# Altium PCB BSPD.PcbDoc
Units mm, origin at the board's own origin, x right, y up, seen from the top; angles counter-clockwise.
Board outline 49.96 x 69.09 mm, 2 copper layers (Top Layer, Bottom Layer), stack 1.671 mm thick; 35 components, 25 nets, 127 pads, 37 vias.
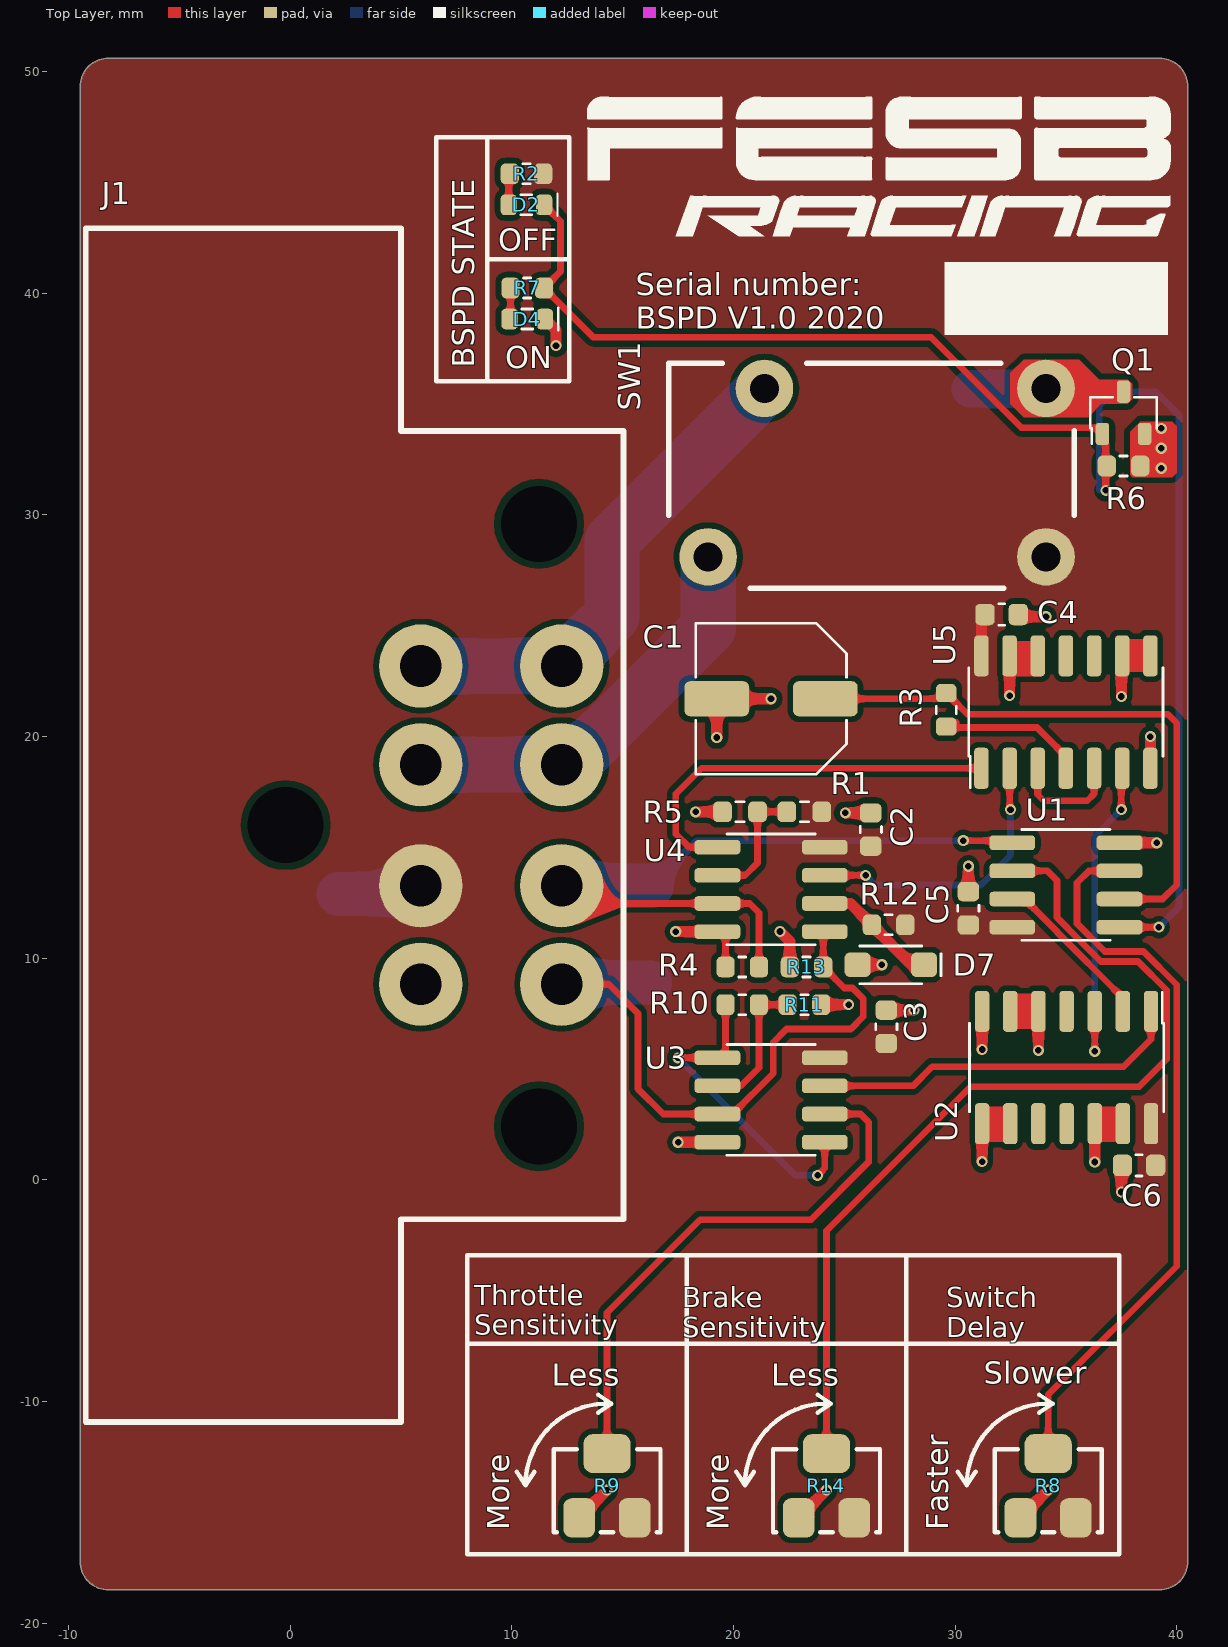
[diagram p0: Top Layer view]
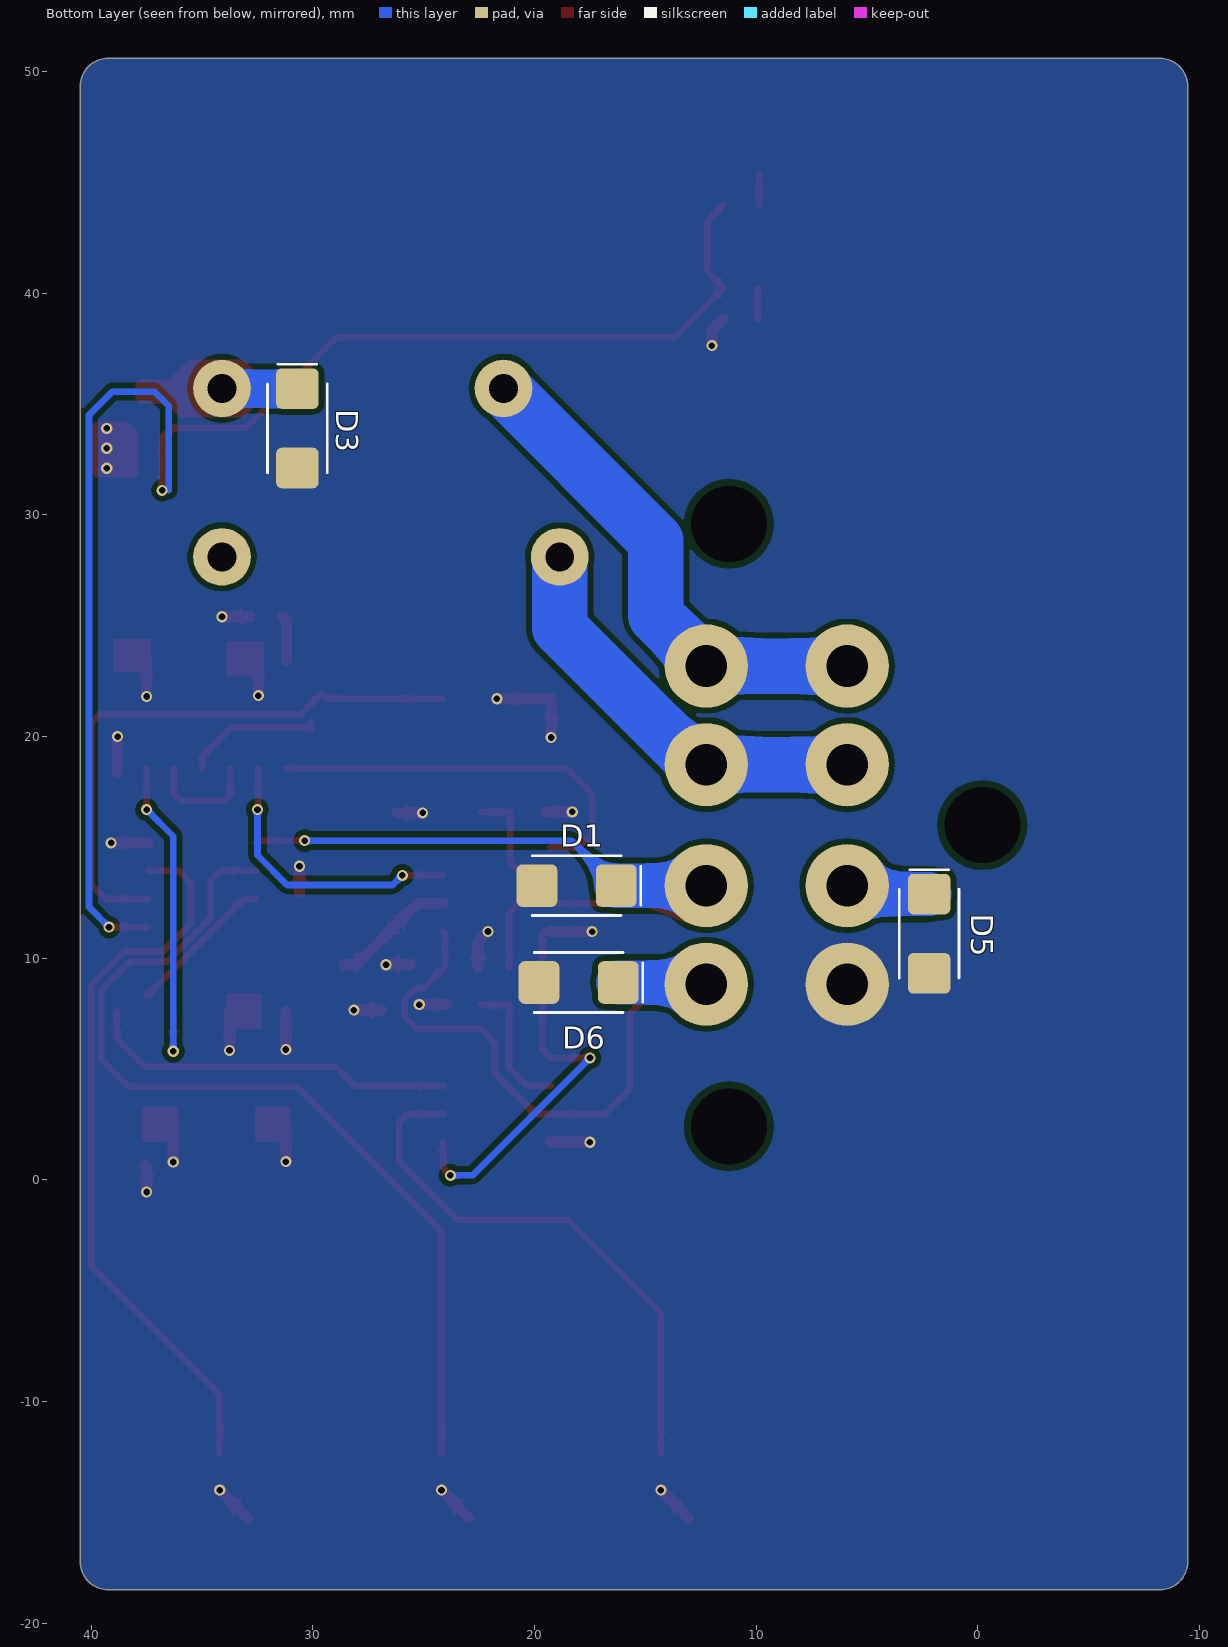
[diagram p1: Bottom Layer view, seen from below]
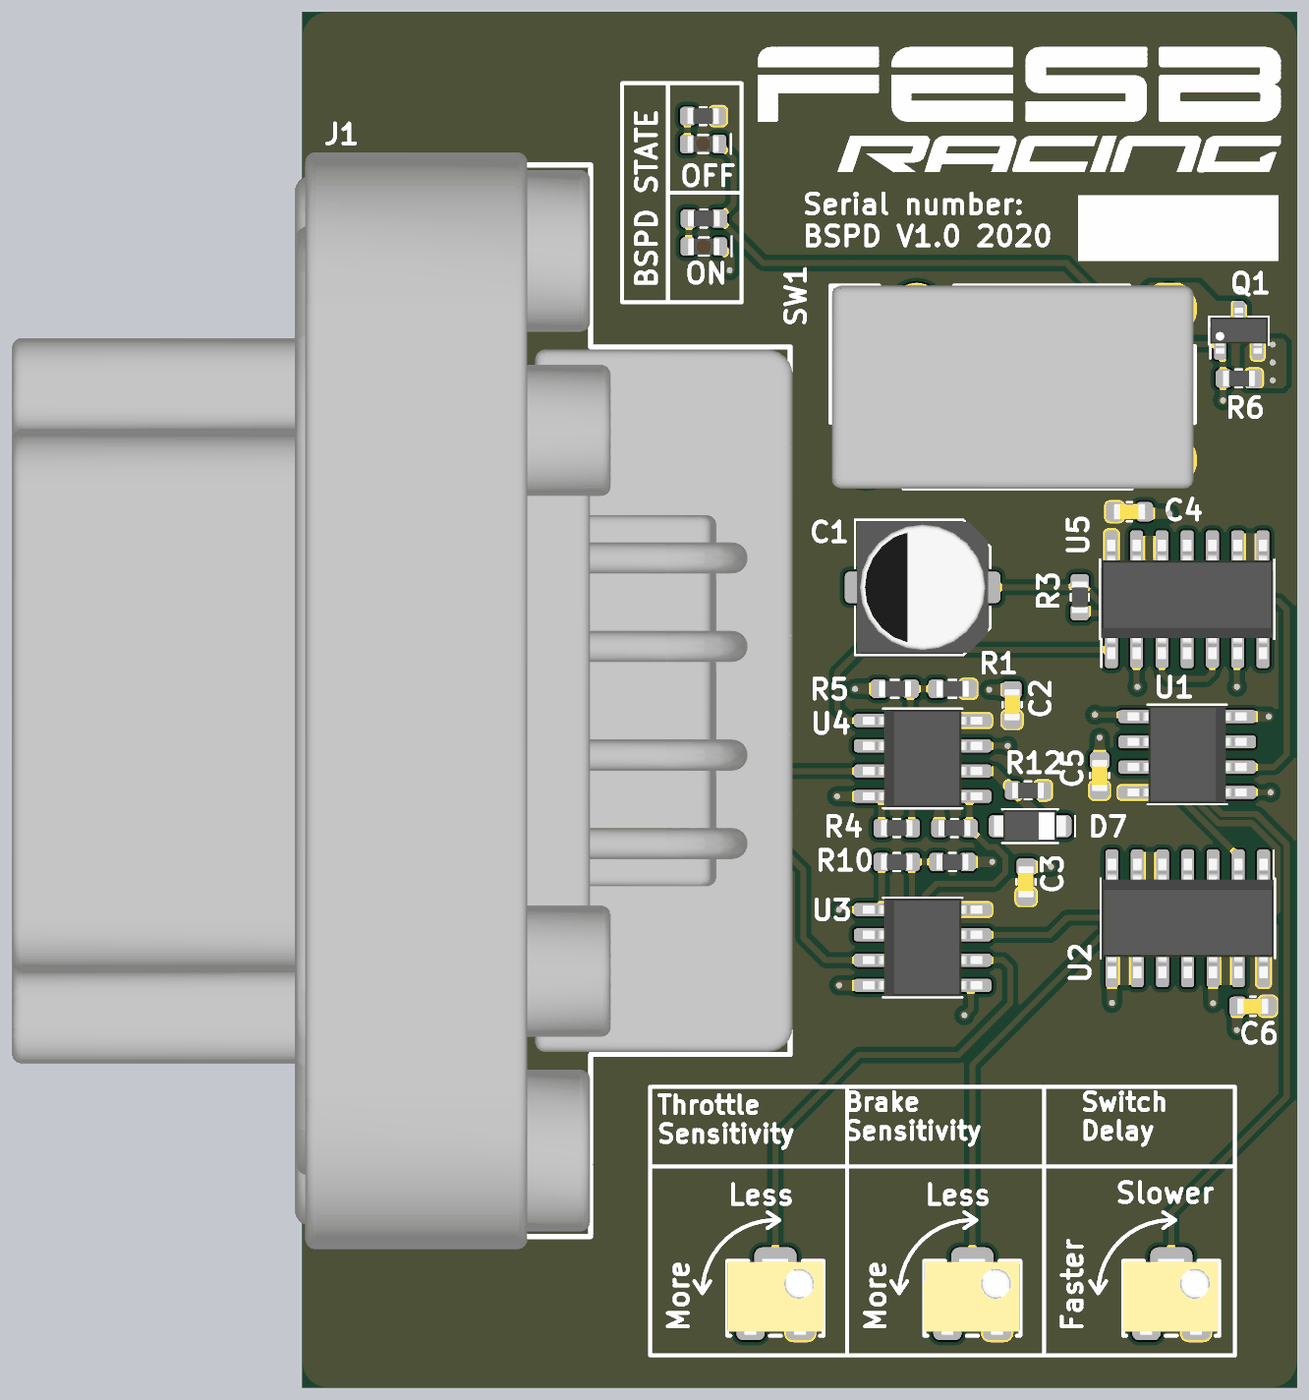
[diagram p2: 3D render of the assembled board from above, using the file's embedded part models]
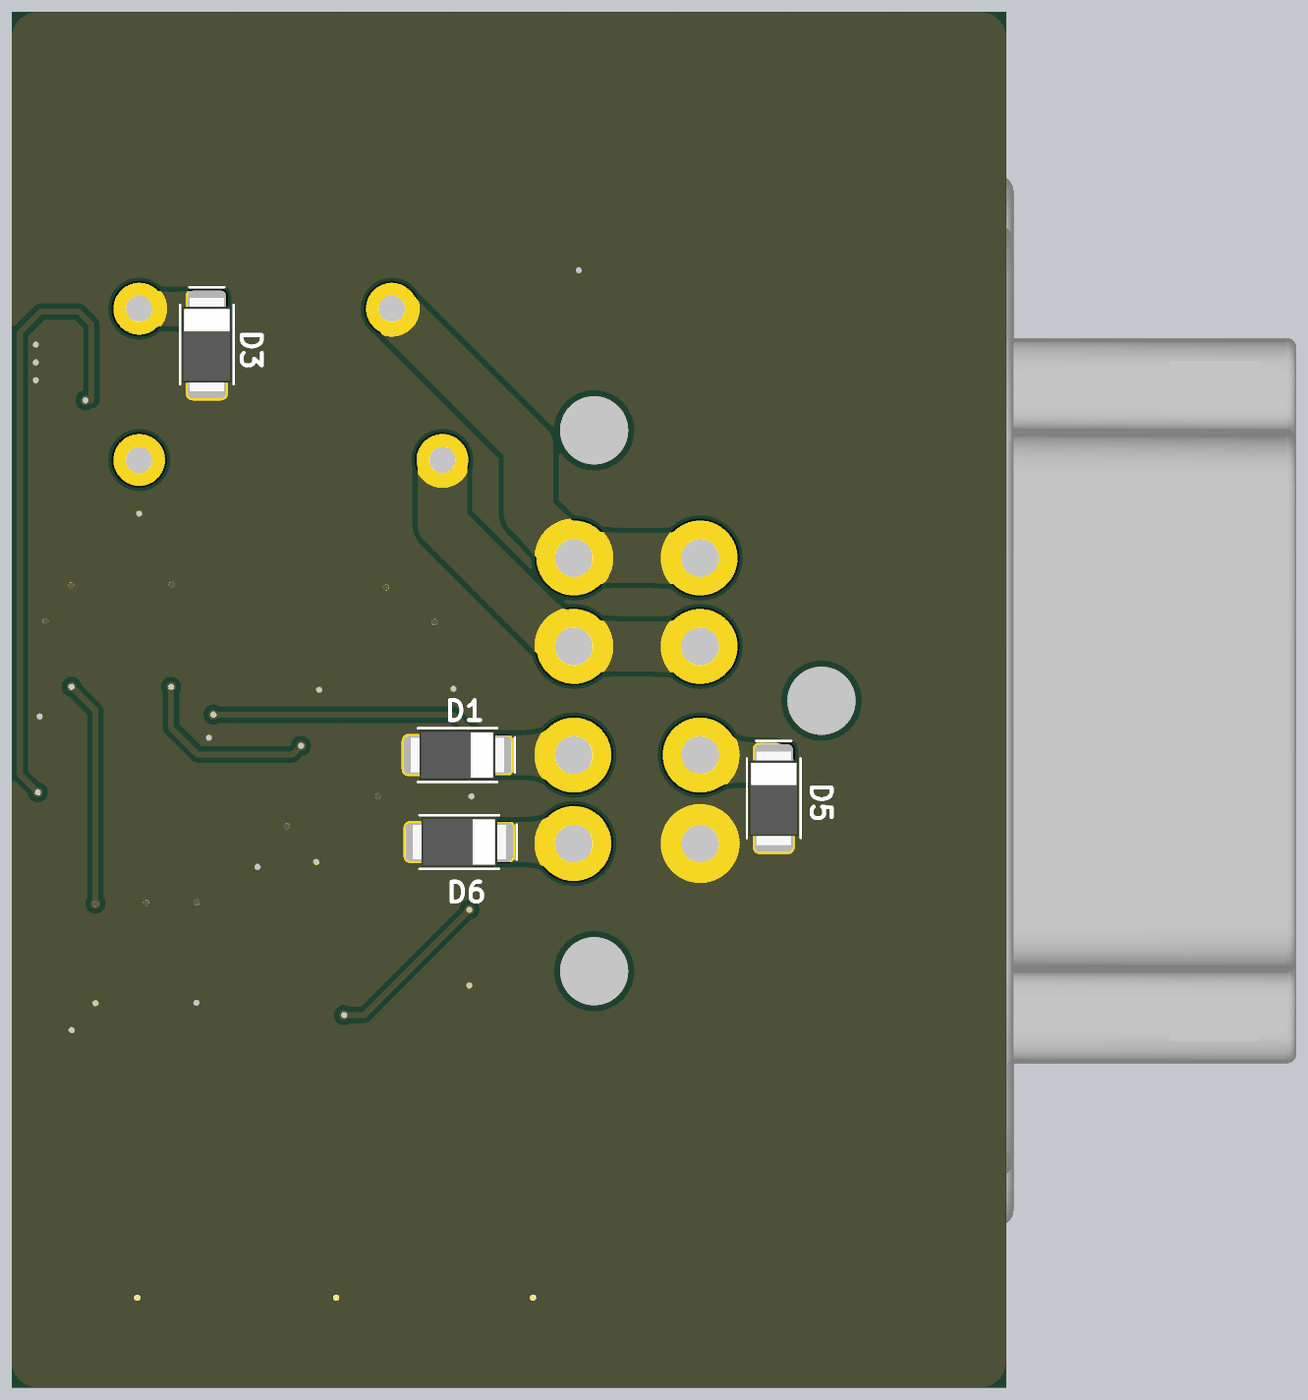
[diagram p3: 3D render of the assembled board from below, using the file's embedded part models]

## Layer stack, top to bottom
Top Solder: solder mask 0.0102, Solder Resist, Dk 3.5
Top Layer: signal copper 0.0356
Dielectric 1: dielectric 1.6, FR-4, Dk 4.8
Bottom Layer: signal copper 0.0356
Bottom Solder: solder mask 0.0102, Solder Resist, Dk 3.5

## Board outline
-9.464,-17.23 -9.464,36.63 ccw(c-9.469,36.63) -9.465,36.633 -9.465,49.33 cw(c-8.2,49.33) -8.2,50.595 39.23,50.595 cw(c39.23,49.33) 40.495,49.33 40.495,-17.23 cw(c39.23,-17.23) 39.23,-18.495 -8.2,-18.495 cw(c-8.2,-18.5) -8.2,-18.495 ccw(c-8.199,-17.23) -8.199,-18.495 -8.2,-18.495 cw(c-8.199,-17.23)

## Design rules (kind name [scope] priority, off if disabled: settings)
Clearance [All] p1: gap=0.254 ignorepadtopadclearanceinfootprint=FALSE except(0.15: Arc-Arc Arc-Track Arc-Text Track-Track Track-Text SMDPad-SMDPad SMDPad-Text THPad-Text Via-Text Fill-Text Poly-Text Region-Text Text-Text; 0.2: Arc-SMDPad Track-SMDPad; 0.3: Arc-Hole Track-Hole SMDPad-Hole THPad-Hole Via-Hole Fill-Hole Poly-Hole Region-Hole Text-Hole; 0.33: Arc-THPad Track-THPad SMDPad-THPad; 0.6: THPad-THPad)
ComponentClearance [All] p1: gap=0 collisioncheckmode=3 verticalgap=0.254 showdistances=FALSE
Height [All] p1: minheight=0 maxheight=999 prefheight=0
HoleSize [All] p1: absolutevalues=TRUE maxlimit=6.3 minlimit=0.2 maxpercent=80.000 minpercent=20.000
MinimumAnnularRing [All] p1: minimumring=0.05
MinimumSolderMaskSliver [All] p1: minsoldermaskwidth=0
PlaneClearance [All] p1: clearance=0.3
PlaneConnect [All] p1: planeconnectstyle=Direct reliefexpansion=0.508 reliefentries=4 reliefconductorwidth=0.254 reliefairgap=0.254
PolygonConnect [All] p1: connectstyle=Direct reliefconductorwidth=0.254 reliefentries=4 polygonreliefangle="90 Angle" airgapwidth=0.254
RoutingVias [All] p1: holewidth=0.3 width=0.5 viastyle="Through Hole" minholewidth=0.2 minwidth=0.45 maxholewidth=1 maxwidth=0.6
SilkToSilkClearance [All] p1: silktosilkclearance=0.15
SilkToSolderMaskClearance [IsPad] p1: minsilkscreentomaskgap=0.1 clearancetoexposedcopper=TRUE
SolderMaskExpansion [All] p1: expansion=0.102
Width [All] p1: maxlimit=10 minlimit=0.2 preferedwidth=0.254
22 further rules are at their usual default settings.

## Components (designator, comment, footprint, x,y, rotation, side; value= is the part's Value field where it differs from the comment)
C1 "100uF" CAPAE660X770D660L220X65N 21.7,21.7 r180 top
C2 "100nF" CAPC160X80X87L35N 26.2,15.8 r90 top
C3 "100nF" CAPC160X80X87L35N 26.9,6.9 r90 top
C4 "100nF" CAPC160X80X87L35N 32.1,25.5 r0 top
C5 "100nF" CAPC160X80X87L35N 30.6,12.245 r90 top
C6 "100nF" CAPC160X80X87L35N 38.3,0.65 r180 top
D1 "PTVS22VP1UP" SODFL470X250X110L130X175N 18.1,13.27 r0 bottom
D2 "Red LED" LEDC160X80X50L30N 10.665,43.98 r180 top
D3 "TPSMF4L24A" SODFL470X250X110L130X175N 30.7,33.9 r270 bottom
D4 "Green LED" LEDC160X80X50L30N 10.7,38.83 r180 top
D5 "PTVS22VP1UP" SODFL470X250X110L130X175N 2.2,11.1 r270 bottom
D6 "PTVS22VP1UP" SODFL470X250X110L130X175N 18.01,8.9 r0 bottom
D7 "4.75V" SODFL360X160X130L80X100N 27.1,9.7 r180 top
J1 "DT13-08PB" DT13-08PB 6.025,16 r90 top
Q1 "2N7002" SOT23-3P95_230X110L30X43N 37.6,34.6 r0 top
R1 "1.3K" RESC160X80X55L30N 23.2,16.6 r180 top
R2 "1.4K" RESC160X80X50L30N 10.665,45.38 r180 top
R3 "15K4" RESC160X80X50L30N 29.6,21.2 r270 top
R4 "100K" RESC160X80X50L30N 20.4,9.6 r180 top
R5 "5K" RESC160X80X55L30N 20.3,16.6 r180 top
R6 "10K" RESC160X80X50L30N 37.6,32.2 r180 top
R7 "1.4K" RESC160X80X50L30N 10.7,40.23 r180 top
R8 "10K" RESDFN3_475X200X100L160X130N 34.2,-13.8 r0 top
R9 "10K" RESDFN3_475X200X100L160X130N 14.3,-13.8 r0 top
R10 "1.4K" RESC160X80X50L30N 20.4,7.9 r180 top
R11 "1K" RESC160X80X50L30N 23.2,7.9 r180 top
R12 "1.76K" RESC160X80X50L30N 27,11.5 r180 top
R13 "100K" RESC160X80X50L30N 23.3,9.6 r180 top
R14 "10K" RESDFN3_475X200X100L160X130N 24.2,-13.8 r0 top
SW1 "SPST-NO" 655414191282 34.1,35.7 r180 top
U1 "OPA2991IDR" SOIC8P127_490X599X175L84X41N 35,13.3 r90 top
U2 "HEF4081BT" SOIC14P127_865X600X175L70X42N 35.03,5.065 r180 top
U3 "OPA2991IDR" SOIC8P127_490X599X175L84X41N 21.7,3.6 r270 top
U4 "OPA2991IDR" SOIC8P127_490X599X175L84X41N 21.7,13.1 r270 top
U5 "HEF4071B" SOIC14P127_865X600X175L70X42N 35,21.1 r0 top

## Footprints (in the part's own frame and the unit in brackets; to place one, negate y for a bottom-side part, rotate by r counter-clockwise, add the part's x,y. Pads: shape width x height; smd on the part's side, far side on the other; paste and mask are expansions set on the pad)
655414191282 [mm]
  round 2.6 hole 1.3: 1(0,7.6) 2(0,0) 3(12.7,0) 4(15.24,7.6)
  silkscreen extent -1.27,-1.14 17.02,9.02, body extent -1.27,-1.16 17.02,9.04, height 14.61
CAPAE660X770D660L220X65N [mm] "Capacitor, Aluminum Electrolytic; 6.60 mm L X 6.60 mm W X 7.70 mm H body"
  rrect32% 2.92x1.58 smd: 1(-2.45,0) 2(2.45,0)
  silkscreen extent -3.4,-3.4 3.4,3.4, body extent -4.11,-3.6 4.11,3.6, height 7.7
CAPC160X80X87L35N [mm] "Capacitor, Chip; 1.60 mm L X 0.80 mm W X 0.87 mm H body"
  rrect51% 0.87x0.97 smd: 1(-0.75,0) 2(0.75,0)
  silkscreen extent -0.14,-0.48 0.14,0.48, body extent -1.39,-0.69 1.39,0.69, height 0.87
DT13-08PB [mm]
  round 3.76 hole 1.88: 1(-7.175,-6.225) 2(-2.73,-6.225) 3(2.73,-6.225) 4(7.175,-6.225) 5(7.175,0.125) 6(2.73,0.125) 7(-2.73,0.125) 8(-7.175,0.125)
  round 1.524 hole 3.43 unplated: ""(-13.59,-5.205) ""(0,6.225) ""(13.59,-5.205)
  silkscreen extent -26.92,-9.02 26.92,15.24, body extent -27.56,-10.2 27.56,30.3, height 36.13
LEDC160X80X50L30N [mm] "LED, Chip; 1.60 mm L X 0.80 mm W X 0.50 mm H body"
  rrect51% 0.74x0.93 smd: A(0.795,0) C(-0.795,0)
  silkscreen extent -1.4,-0.51 0.25,0.51, body extent -0.8,-0.4 0.8,0.4, height 0.85
RESC160X80X50L30N [mm] "Resistor, Chip; 1.60 mm L X 0.80 mm W X 0.50 mm H body"
  rrect51% 0.82x0.93 smd: 1(-0.755,0) 2(0.755,0)
  silkscreen extent -0.17,-0.45 0.17,0.45, body extent -1.37,-0.67 1.37,0.67, height 1
RESC160X80X55L30N [mm] "Resistor, Chip; 1.60 mm L X 0.80 mm W X 0.55 mm H body"
  rrect50% 0.84x0.93 smd: 1(-0.79,0) 2(0.79,0)
  silkscreen extent -0.19,-0.45 0.19,0.45, body extent -1.4,-0.66 1.4,0.66, height 0.54
RESDFN3_475X200X100L160X130N [mm] "Resistor, Dual Flat No-Lead (DFN 3 Pins), 2.90 mm pitch; 3 pin, 4.75 mm L X 2.00 mm W X 1.00 mm H body"
  rrect50% 1.43x1.77 smd: 1(-1.25,-1.45) 3(1.25,-1.45)
  rrect50% 2.13x1.77 smd: 2(0,1.45)
  silkscreen extent -2.41,-2.11 2.41,1.65, body extent -2.41,-2.1 2.39,1.8, height 5.3
SODFL360X160X130L80X100N [mm] "Diode, Small Outline Diode Flat Lead (SODFL); 2.675 mm L X 1.60 mm W X 1.30 mm H body"
  rrect45% 1.17x1.11 smd: A(1.5,0) C(-1.5,0)
  silkscreen extent -2.26,-0.85 1.4,0.85, body extent -2.23,-1 2.23,1, height 1.3
SODFL470X250X110L130X175N [mm] "Diode, Small Outline Diode Flat Lead (SODFL); 3.80 mm L X 2.50 mm W X 1.10 mm H body"
  rrect27% 1.83x1.92 smd: A(1.79,0) C(-1.79,0)
  silkscreen extent -2.89,-1.35 2,1.35, body extent -2.35,-1.25 2.35,1.25, height 1.1
SOIC8P127_490X599X175L84X41N [mm] "Small Outline IC (SOIC), 1.27 mm pitch; 8 pin, 4.905 mm L X 3.895 mm W X 1.75 mm H body"
  rrect52% 0.66x2.07 smd: 1(-1.905,-2.42) 2(-0.635,-2.42) 3(0.635,-2.42) 4(1.905,-2.42) 5(1.905,2.42) 6(0.635,2.42) 7(-0.635,2.42) 8(-1.905,2.42)
  silkscreen extent -2.5,-1.99 2.5,1.99, body extent -2.7,-3.65 2.7,3.65, height 1.75
SOIC14P127_865X600X175L70X42N [mm] "Small Outline IC (SOIC), 1.27 mm pitch; 14 pin, 8.65 mm L X 3.90 mm W X 1.75 mm H body"
  rrect49% 0.65x1.85 smd: 1(-3.81,-2.535) 2(-2.54,-2.535) 3(-1.27,-2.535) 4(0,-2.535) 5(1.27,-2.535) 6(2.54,-2.535) 7(3.81,-2.535) 8(3.81,2.535) 9(2.54,2.535) 10(1.27,2.535) 11(0,2.535) 12(-1.27,2.535) 13(-2.54,2.535) 14(-3.81,2.535)
  silkscreen extent -4.38,-3.4 4.38,2, body extent -4.57,-3.66 4.57,3.66, height 1.75
SOT23-3P95_230X110L30X43N [mm] "Small Outline Transistor (SOT23), 0.95 mm pitch; 3 pin, 2.90 mm L X 1.30 mm W X 1.10 mm H body"
  rrect49% 0.61x1.01 smd: 1(-0.95,-0.955) 2(0.95,-0.955) 3(0,0.955)
  silkscreen extent -1.5,-1.4 1.5,0.7, body extent -1.7,-1.66 1.7,1.66, height 1.1

## Part data
C1: library part C_100uF_25V, Capacitor Case Style=Radial, Manufacturer Part Number=865080445010, Supplier Part Number=710-865080445010, Voltage Rating="25 V", ComponentLinkDescription=Datasheet, ComponentLinkURL=https://hr.mouser.com/datasheet/2/445/865080445010-1726566.pdf, FR_SN=C_P-07, Part Number=C_100uF_25V
C2 C3 C4 C5 C6: library part C_0603_100nF_50V, Capacitor Case Style=0603, Manufacturer Part Number=CC0603MRY5V9BB104, Supplier Part Number=603-C0603MRY5V9BB104, Voltage Rating=50V, ComponentLinkDescription=Datasheet, ComponentLinkURL=https://hr.mouser.com/datasheet/2/212/KEM_C1027_X7, FR_SN=C_NP-02, Part Number=C_0603_100nF_50V
D1 D5 D6: library part TVS_22V, Diode Case Style=SOD-128, Manufacturer Part Number=PTVS22VP1UP,115, Peak Pulse Power=600W, Stand-off Voltage=22V, Supplier Part Number=771-PTVS22VP1UP115, ComponentLinkDescription=Datasheet, ComponentLinkURL=https://hr.mouser.com/datasheet/2/916/PTVSXP1UP_SER-1320701.pdf, FR_SN=TVS-02, Part Number=TVS_22V
D2: library part LED_Red_60mcd, Diode Case Style=0603, Forward Current=20mA, Manufacturer Part Number=150060SS75000, Max Reverse Voltage=5V, Supplier Part Number=710-150060SS75000, ComponentLinkDescription=Datasheet, ComponentLinkURL=https://hr.mouser.com/datasheet/2/445/150060SS75000-368982.pdf, Diode Type=LED, FR_SN=D_LED-03, Part Number=LED_Red_60mcd
D3: library part TVS_24V, Diode Case Style=SOD-123, Peak Pulse Power=400W, Stand-off Voltage=24V, Supplier Part Number=576-TPSMF4L24A, ComponentLinkDescription=Datasheet, ComponentLinkURL=https://hr.mouser.com/datasheet/2/240/Littelfuse_TVS_Diode_TPSMF4L_Datasheet.pdf-952419.pdf, FR_SN=TVS_03, Manufacturer Part Number=TPSMF4L24A, Part Number=TVS_24V
D4: library part LED_Green_20mcd@12V,1.4K, Diode Case Style=SMD, Forward Current=20mA, Manufacturer Part Number=150060VS55040, Max Reverse Voltage=5V, Supplier Part Number=710-150060VS55040, ComponentLinkDescription=Datasheet, ComponentLinkURL=https://hr.mouser.com/datasheet/2/445/150060VS55040-1313752.pdf, Diode Type=LED, FR_SN=D_LED-02, Part Number=LED_Green_20mcd@12V,1.4K
D7: library part D_4.75V_625mW, Diode Case Style=SOD-123-2, Manufacturer Part Number=PDZ4.7BGWX, Power Dissipation=625mW, Supplier Part Number=771-PDZ4.7BGWX, Tolerance="2 %", ComponentLinkDescription=Datasheet, ComponentLinkURL=https://hr.mouser.com/datasheet/2/916/PDZ-GW_SER-1599748.pdf, FR_SN=D_Z-03, Part Number=D_4.75V_625mW, Voltage Rating=4.75V
J1: library part "DT13-08PB 2x4", Supplier Part Number=571-DT13-08PB, ComponentLinkDescription=Datasheet, ComponentLinkURL=https://www.te.com/commerce/DocumentDelivery/DDEController?Action=srchrtrv&DocNm=DT13-08PX&DocType=Customer+Drawing&DocLang=English&PartCntxt=DT13-08PB&DocFormat=pdf, FR_SN=J-17, Manufacturer Part Number=DT13-08PB, Part Number="DT13-08PB 2x4"
Q1: library part Q_N_GSD, Continuous Drain Current Id="120 mA", Drain Source Voltage Uds="60 V", On Resistance Rds(on)="1.2 Ohms", Power Dissipation Pd="200 mW", Supplier Part Number=512-2N7002, Transistor Case Style=SOT-23-3, ComponentLinkDescription=Datasheet, ComponentLinkURL=https://hr.mouser.com/ProductDetail/ON-Semiconductor-Fairchild/2N7002?qs=0dwsXDNhqlz66WJJhrTFjQ%3D%3D, FR_SN=T_M-03, Manufacturer Part Number=2N7002, Part Number=Q_N_GSD
R1: library part R_0603_1.3K_0W1_C, Manufacturer Part Number=ERJ-3EKF1301V, Power Rating=100mW, Resistor Case Style=0603, Supplier Part Number=667-ERJ-3EKF1301V, Temperature Coefficient="100 PPM / C", ComponentLink1Description=Datasheet, ComponentLink1URL=https://hr.mouser.com/datasheet/2/315/AOA0000C304-1149620.pdf, FR_SN=R-56, Part Number=R_0603_1.3K_0W1_C
R2 R7 R10: library part R_0603_1.4K_0W1, Manufacturer Part Number=RT0603DRE071K4L, Power Rating=100mW, Resistor Case Style=0603, Supplier Part Number=603-RT0603DRE071K4L, Temperature Coefficient="50 PPM / C", ComponentLink1Description=Datasheet, ComponentLink1URL=https://hr.mouser.com/datasheet/2/447/PYu-RT_1-to-0.01_RoHS_L_9-1222720.pdf, FR_SN=R-06, Part Number=R_0603_1.4K_0W1
R3: library part R_0603_15.4K_0W062, Manufacturer Part Number=APC0603B15K4N, Power Rating=62.5mW, Resistor Case Style=0603, Supplier Part Number=284-APC0603B15K4N, Temperature Coefficient="25 PPM/C", ComponentLink1Description=Datasheet, ComponentLink1URL=https://hr.mouser.com/datasheet/2/303/APC-1-15.34-911303.pdf, FR_SN=R-53, Part Number=R_0603_15.4K_0W062
R4 R13: library part R_0603_100K_0W1_C, Manufacturer Part Number=CRCW0603100KFKEAC, Power Rating=100mW, Resistor Case Style=0603, Supplier Part Number=71-CRCW0603100KFKEAC, Temperature Coefficient="100 PPM / C", ComponentLink1Description=Datasheet, ComponentLink1URL=https://hr.mouser.com/datasheet/2/427/crcwce3-1223726.pdf, FR_SN=R-34, Part Number=R_0603_100K_0W1_C
R5: library part R_0603_5K_0W1_P_C, Manufacturer Part Number=RT0603BRE075KL, Power Rating=100mW, Resistor Case Style=0603, Supplier Part Number=603-RT0603BRE075KL, Temperature Coefficient="50 PPM / C", ComponentLink1Description=Datasheet, ComponentLink1URL=https://hr.mouser.com/datasheet/2/447/PYu-RT_1-to-0.01_RoHS_L_11-1669912.pdf, FR_SN=R-55, Part Number=R_0603_5K_0W1_P_C
R6: library part R_0603_10K_0W062_P, Manufacturer Part Number=APC0603B10K0N, Power Rating=62.5mW, Resistor Case Style=0603, Supplier Part Number=284-APC0603B10K0N, Temperature Coefficient="25 PPM / C", ComponentLink1Description=Datasheet, ComponentLink1URL=https://hr.mouser.com/datasheet/2/303/APC-1-15.34-911303.pdf, FR_SN=R-11, Part Number=R_0603_10K_0W062_P
R8 R9 R14: library part Trimmer_10K_0W250, Manufacturer Part Number=PVG5A103C03B00, Power Rating=250mW, Resistor Case Style=Vertical, Supplier Part Number=81-PVG5A103C03B00, Temperature Coefficient="150 PPM/C", ComponentLink1Description=Datasheet, ComponentLink1URL=https://hr.mouser.com/datasheet/2/54/pvg5-907351.pdf, FR_SN=Trim-02, Part Number=Trimmer_10K_0W250
R11: library part R_0603_1K_0W1, Manufacturer Part Number=CRCW06031K00FKEAC, Power Rating=100mW, Resistor Case Style=0603, Supplier Part Number=71-CRCW06031K00FKEAC, Temperature Coefficient="100 PPM / C", ComponentLink1Description=Datasheet, ComponentLink1URL=https://hr.mouser.com/ProductDetail/Vishay/CRCW06031K00FKEAC?qs=sGAEpiMZZMtlubZbdhIBIIZe04wfiaJW%2fzoax%252b8jFdk%3d, FR_SN=R-01, Part Number=R_0603_1K_0W1
R12: library part R_0603_1.76K_0W1_P, Manufacturer Part Number=RT0603BRD071K76L, Power Rating=100mW, Resistor Case Style=0603, Supplier Part Number=603-RT0603BRD071K76L, Temperature Coefficient="25 PPM / C", ComponentLink1Description=Datasheet, ComponentLink1URL=https://hr.mouser.com/ProductDetail/Yageo/RT0603BRD071K76L?qs=sGAEpiMZZMu61qfTUdNhGyjxuWj6R%252BAvNaA7oRf469yqgHOwdPrDqQ%3D%3D, FR_SN=R-15, Part Number=R_0603_1.76K_0W1_P
SW1: library part Relay_Non-L_TH, Manufacturer Part Number=4-1419128-2, Supplier Part Number=655-4-1419128-2, Switch Case Style=Relay, ComponentLinkDescription=Datasheet, ComponentLinkURL=https://www.te.com/commerce/DocumentDelivery/DDEController?Action=srchrtrv&DocNm=1461104&DocType=Customer+Drawing&DocLang=English&PartCntxt=4-1419128-2&DocFormat=pdf, Configuration=SPST-NO, FR_SN=SW-03, Part Number=Relay_Non-L_TH, Type=Non-Latching
U1 U3 U4: IC Case Style=SOIC-8, Supplier Part Number=595-OPA2991IDR, Category="Dual Chanel OP Amp", ComponentLinkDescription=Datasheet, ComponentLinkURL=http://www.ti.com/lit/ds/symlink/opa2991.pdf, FR_SN=U_Analog-08, Manufacturer Part Number=OPA2991IDR, Part Number=OPA2991IDR
U2: IC Case Style=SO-14, Manufacturer Part Number=HEF4081BT,653, Supplier Part Number=771-HEF4081BTD-T, Category="Logic AND Gate", ComponentLinkDescription=Datasheet, ComponentLinkURL=https://hr.mouser.com/datasheet/2/916/HEF4081B_Q100-1599374.pdf, FR_SN=IC_Misc-20, Part Number=HEF4081BT
U5: IC Case Style=SO-14, Manufacturer Part Number=HEF4071BT,653, Supplier Part Number=771-HEF4071BTD-T, Category="Logic OR Gate", ComponentLinkDescription=Datasheet, ComponentLinkURL=https://hr.mouser.com/datasheet/2/916/HEF4071B-1599180.pdf, FR_SN=IC_Misc-21, Part Number=HEF4071B

## Via types
v1: diameter 0.5, hole 0.3, Top Layer to Bottom Layer, tented both sides, 37 vias

## Nets (pads, with @x,y where several pads share a name; then routed paths per layer and width w, separated by ;. In a path a pad name is that pad's centre, name@x,y a point inside that pad or via, vN(x,y) a via of type N, cw(c..) or ccw(c..) an arc to the next point about the centre after c; other vN are vias at no path point)
+12V: C2.1 C3.1 C4.1 C5.1 C6.1 D5.C J1.7 R1.1 R2.1 R8.3 R9.3 R12.1 R14.3 SW1.1 U1.8 U2.14 U3.8 U4.8 U5.14 | length 5.9
  Top Layer w0.5: U5.14@31.19,23.435 31.19,25.24 C4.1@31.35,25.4
  Bottom Layer w2: D5.C 5.52,12.89 J1.7
Brake: D6.C J1.1 R13.1 U3.3 U4.5 | length 29.5
  Top Layer w0.3: J1.1 14.375,8.825 15.7,7.5 15.7,4.1 16.835,2.965 U3.3 19.965,2.965 21.8,4.8 21.8,6.2 22.4,6.8 25.3,6.8 25.854,7.354 25.854,8.171 25.37,8.655 25,8.655 R13.1 24.055,11.13 U4.5
  Bottom Layer w2: J1.1 12.325,8.9 D6.C
GND: C1.2 C2.2 C3.2 C4.2 C5.2 C6.2 D1.A D3.A D4.C D5.A D6.A D7.A J1.8 Q1.2 R4.2 R5.2 R6.1 R8.1 R9.1 R11.1 R13.2 R14.1 U1.4 U2.5 U2.6 U2.7 U2.8 U2.9 U2.12 U2.13 U3.4 U4.4 U5.7 U5.8 U5.9 U5.12 U5.13 | length 41.7
  Top Layer w0.3: U4.4 19.605,11.195 19.645,11.155 R4.2
  Top Layer w0.5: D4.C 12,38.325 v1(12,37.63) ; R9.1 v1(14.3,-14) ; v1(17.4,11.195) U4.4 ; v1(17.505,1.695) U3.4 ; v1(18.3,16.6) R5.2 ; v1(19.25,19.95) C1.2 v1(21.7,21.7) ; v1(22.1,11.2) 22.545,10.755 R13.2 ; R14.1 v1(24.2,-14) ; R11.1 v1(25.2,7.9) ; v1(25.05,16.55) C2.2 ; D7.A v1(26.7,9.7) ; C3.2 v1(28.15,7.65) ; C5.2 v1(30.6,14.145) ; v1(31.22,0.82) U2.8 ; v1(31.22,5.88) U2.7 ; v1(32.46,21.84) U5.13@32.46,23.435 ; C4.2@32.85,25.4 v1(34.1,25.4) ; R8.1 v1(34.2,-14) ; v1(33.76,5.84) U2.5 ; v1(36.3,0.8) U2.12@36.3,2.9 ; U1.4 39.095,15.205 v1(39.1,15.2) ; v1(37.5,-0.55) 37.5,0.6 C6.2 ; v1(37.5,21.8) U5.9@37.5,23.395 ; U5.7@38.81,18.365 v1(38.81,19.99)
  other v1: 39.3,32.1 39.3,33 39.3,33.9
NetC1_1: C1.1 R3.1 U1.2 | length 26.7
  Top Layer w0.3: C1.1 29.345,21.7 R3.1 30.555,21 39.6,21 40,20.6 40,13.3 39.365,12.665 U1.2
NetD2_A: D2.A R2.2 | length 1.4
  Top Layer w0.3: D2.A 9.87,45.34 R2.2
NetD2_C: D2.C Q1.1 R6.2 R7.1 U1.1 | length 68.3
  Top Layer w0.3: D2.C 12.2,43.24 12.2,40.975 R7.1 13.685,38 28.929,38 33.009,33.92 36.375,33.92 Q1.1 36.8,33.495 v1(36.8,31.1) ; U1.1 v1(39.195,11.395)
  Bottom Layer w0.3: 36.5,31.1 36.5,34.9 37.155,35.555 39.045,35.555 40.1,34.5 40.1,12.3 v1(39.195,11.395)
NetD3_C: D3.C Q1.3 SW1.2 | length 3.3
  Bottom Layer w1.7: D3.C SW1.2@33.99,35.69
NetD4_A: D4.A R7.2 | length 1.4
  Top Layer w0.3: D4.A 9.945,38.87 R7.2
NetD7_C: D7.C R12.2 U4.6 | length 5.6
  Top Layer w0.5: U4.6 25.28,12.465 R12.2 28.045,9.7 D7.C
NetR1_2: R1.2 R5.1 U4.2 | length 5.7
  Top Layer w0.3: U4.2 20.535,13.735 21.09,14.29 R5.1 R1.2
NetR3_2: R3.2 U5.4 | length 6.3
  Top Layer w0.3: R3.2@30.05,20.631 30.05,20.4 33.7,20.4 35,19.1 U5.4
NetR8_2: R8.2 U1.3 | length 33.2
  Top Layer w0.3: R8.2 34.2,-9.7 40,-3.9 40,8.8 38.5,10.3 36.756,10.3 35.5,11.556 35.5,13.4 36.035,13.935 U1.3
NetR9_2: R9.2 U3.6 | length 24.9
  Top Layer w0.3: R9.2 14.3,-6 18.5,-1.8 23.5,-1.8 26.1,0.8 26.1,2.6 25.735,2.965 U3.6
NetR10_1: R10.1 R11.2 U3.2 | length 6.3
  Top Layer w0.3: U3.2 20.335,4.235 21.155,5.055 R10.1 R11.2
NetR10_2: R10.2 U3.1 U3.5 | length 14.5
  Top Layer w0.3: v1(17.5,5.5) 17.505,5.505 U3.1 19.645,5.87 R10.2 ; v1(23.8,0.2) 24.12,0.52 U3.5
  Bottom Layer w0.3: v1(17.5,5.5) 22.8,0.2 v1(23.8,0.2)
NetR14_2: R14.2 U1.6 | length 41.9
  Top Layer w0.3: R14.2 24.2,-2.3 30.7,4.2 38.3,4.2 39.55,5.45 39.55,8.55 38.25,9.85 36.569,9.85 35.05,11.369 35.05,11.386 34.6,11.836 34.6,13.5 34.165,13.935 U1.6
NetU1_7: U1.7 U2.2 | length 6.7
  Top Layer w0.3: U1.7 33.135,12.665 34.6,11.2 34.6,11.183 U2.2@37.5,8.283
NetU2_1: U2.1 U3.7 | length 16.9
  Top Layer w0.3: U3.7 28.1,4.235 28.965,5.1 37.6,5.1 38.84,6.34 U2.1
NetU2_3: U2.3 U5.6 | length 15.1
  Top Layer w0.3: v1(36.3,5.8) U2.3 ; v1(37.5,16.7) 37.5,18.525 U5.6
  Bottom Layer w0.3: v1(36.3,5.8) 36.3,15.5 v1(37.5,16.7)
NetU4_1: U4.1 U5.1 | length 18.2
  Top Layer w0.3: U4.1 17.995,15.005 17.4,15.6 17.4,17.4 18.565,18.565 U5.1
NetU4_7: U4.7 U5.2 | length 13.1
  Top Layer w0.3: U4.7 v1(25.965,13.735) ; U5.2 32.46,16.74 v1(32.5,16.7)
  Bottom Layer w0.3: v1(25.965,13.735) 26.4,13.3 31.163,13.3 32.5,14.637 v1(32.5,16.7)
NetU5_3: U5.3 U5.5 | length 5.1
  Top Layer w0.3: U5.3 33.73,17.37 34,17.1 35.96,17.1 36.27,17.41 U5.5
Out1: J1.4 J1.5 SW1.3 | length 22.7
  Bottom Layer w2.5: J1.5 J1.4 14.525,25.45 14.525,28.825 SW1.3
Out2: J1.3 J1.6 SW1.4 | length 18.7
  Bottom Layer w2.5: J1.6 J1.3 12.82,19.3 13.268,19.3 18.86,24.892 SW1.4
Throttle: D1.C J1.2 R4.1 U1.5 U4.3 | length 33.1
  Top Layer w0.3: J1.2 13.055,12.465 U4.3 20.735,12.465 21.155,12.045 R4.1 ; v1(30.37,15.3) 32.485,15.3 U1.5
  Bottom Layer w0.3: D1.C 18.34,15.3 v1(30.37,15.3)
  Bottom Layer w2: J1.2 D1.C
pads on no net: J1. U2.4 U2.10 U2.11 U5.10 U5.11

## Polygon pours and split planes (outlines as drawn)
GND on Bottom Layer "Outline and holes-No Net 1" (solid, pour order 2): -9.464,-17.23 -9.464,36.63 ccw(c-9.469,36.63) -9.465,36.633 -9.465,49.33 cw(c-8.2,49.33) -8.2,50.595 39.23,50.595 cw(c39.23,49.33) 40.495,49.33 40.495,-17.23 cw(c39.23,-17.23) 39.23,-18.495 -8.2,-18.495 cw(c-8.2,-18.501) -8.2,-18.495 ccw(c-8.199,-17.231) -8.199,-18.495 -8.2,-18.495 cw(c-8.199,-17.23)
+12V on Top Layer "Outline and holes-No Net 1" (solid, pour order 4): -9.464,-17.23 -9.464,36.63 ccw(c-9.469,36.63) -9.465,36.633 -9.465,49.33 cw(c-8.2,49.33) -8.2,50.595 39.23,50.595 cw(c39.23,49.33) 40.495,49.33 40.495,-17.23 cw(c39.23,-17.23) 39.23,-18.495 -8.2,-18.495 cw(c-8.2,-18.501) -8.2,-18.495 ccw(c-8.199,-17.231) -8.199,-18.495 -8.2,-18.495 cw(c-8.199,-17.23)

## Other copper
Top Layer:
  rectangle net GND: 31.02,1.7 32.62,3.3
  rectangle net GND: 36.1,1.7 37.7,3.3
  rectangle net GND: 37.3,22.9 39,24.4
  region net GND: 33.9,22.7 33.9,24.3 32.2,24.3 32.2,22.7
  region net GND: 33.9,6.8 33.9,8.4 32.3,8.4 32.3,6.8
  region net NetD3_C: 36,34.4 36.6,35 37.8,35 38,35.2 38,35.9 37.8,36.1 36.5,36.1 35.6,37 33.1,37 32.5,36.4 32.5,35 33.1,34.4
  region net GND: 38.35,34.2 37.9,33.75 37.9,31.8 38,31.7 39.8,31.7 40,31.9 40,34 39.8,34.2

## Silkscreen, mask and mechanical layers (free items; w line width, h text height)
Top Overlay:
  drawing of 825 lines, arcs and shapes, not listed
  text "OFF" at 9.4,41.9 h1
  text "Serial number: / BSPD V1.0 2020" at 15.6,38.4 h1
  text "BSPD STATE" at 8.3,36.63 h1 r90
  text "ON" at 9.7,36.6 h1
  text "Throttle / Sensitivity" at 8.3,-7 h0.9
  text "Brake / Sensitivity" at 17.7,-7.1 h0.9
  text "Switch / Delay" at 29.6,-7.1 h0.9
  text "Slower" at 31.3,-9.2 h1
  text "Less" at 11.8,-9.3 h1
  text "Less" at 21.7,-9.3 h1
  text "More" at 9.9,-15.8 h1 r90
  text "More" at 19.8,-15.8 h1 r90
  text "Faster" at 29.7,-15.8 h1 r90
Outline and holes:
  lines w0.01: -9.47,-17.23 ccw(c-8.2,-17.23) -8.2,-18.5 ; -9.47,-17.23 ccw(c-8.2,-17.23) -8.2,-18.5 ; -9.47,-17.23 ccw(c-8.2,-17.23) -8.2,-18.5 ; -9.47,-17.23 ccw(c-8.2,-17.23) -8.2,-18.5 ; -9.47,-17.23 -9.47,31.5 ; -9.47,-17.23 -9.47,31.5 ; -9.47,-17.23 -9.47,31.5 ; -9.47,-17.23 -9.47,31.5 ; -9.47,31.5 -9.47,36.63 ; -9.47,31.5 -9.47,36.63 ; -9.47,31.5 -9.47,36.63 ; -9.47,31.5 -9.47,36.63 ; -9.47,49.33 cw(c-8.2,49.33) -8.2,50.6 ; -9.47,49.33 cw(c-8.2,49.33) -8.2,50.6 ; -9.47,49.33 -9.47,35.4 -9.47,49.33 ; -9.469,-17.23 ccw(c-8.199,-17.23) -8.199,-18.5 ; -9.469,-17.23 ccw(c-8.199,-17.23) -8.199,-18.5 ; -9.469,-17.23 ccw(c-8.199,-17.23) -8.199,-18.5 ; -9.469,-17.23 ccw(c-8.199,-17.23) -8.199,-18.5 ; -9.469,-17.23 -9.469,31.5 ; -9.469,-17.23 -9.469,31.5 ; -9.469,-17.23 -9.469,31.5 ; -9.469,-17.23 -9.469,31.5 ; -9.469,31.5 -9.469,36.63 ; -9.469,31.5 -9.469,36.63 ; -9.469,31.5 -9.469,36.63 ; -9.469,31.5 -9.469,36.63 ; -8.2,-18.5 39.23,-18.5 ; -8.2,-18.5 39.23,-18.5 ; -8.2,50.6 39.23,50.6 ; -8.2,50.6 39.23,50.6 ; 39.23,-18.5 ccw(c39.23,-17.23) 40.5,-17.23 ; 39.23,-18.5 ccw(c39.23,-17.23) 40.5,-17.23 ; 39.23,50.6 cw(c39.23,49.33) 40.5,49.33 ; 39.23,50.6 cw(c39.23,49.33) 40.5,49.33 ; 40.5,-17.23 40.5,49.33 ; 40.5,-17.23 40.5,49.33